# Altium PCB pcb.PcbDoc
Units mil, origin at the board's own origin, x right, y up, seen from the top; angles counter-clockwise.
Board outline 2325 x 3920 mil, 2 copper layers (Top Layer, Bottom Layer); 20 components, 17 nets, 68 pads, 146 vias.
Unrouted connection lines stored in the file: 4.
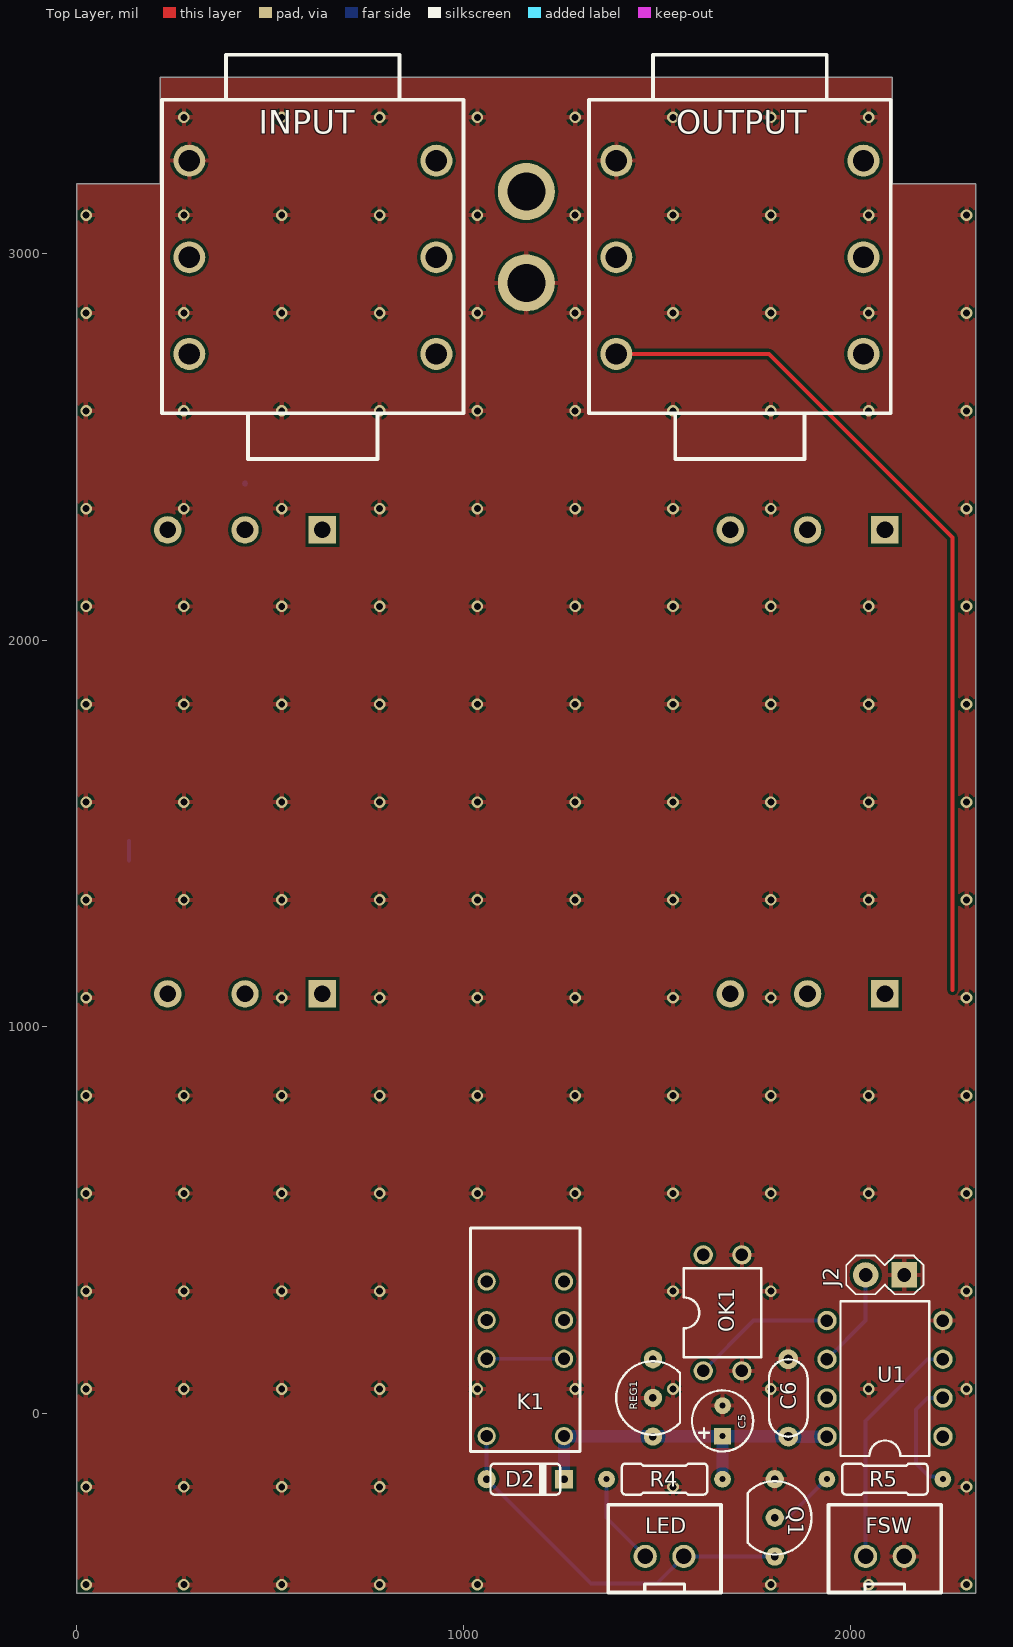
[diagram p0: Top Layer view]
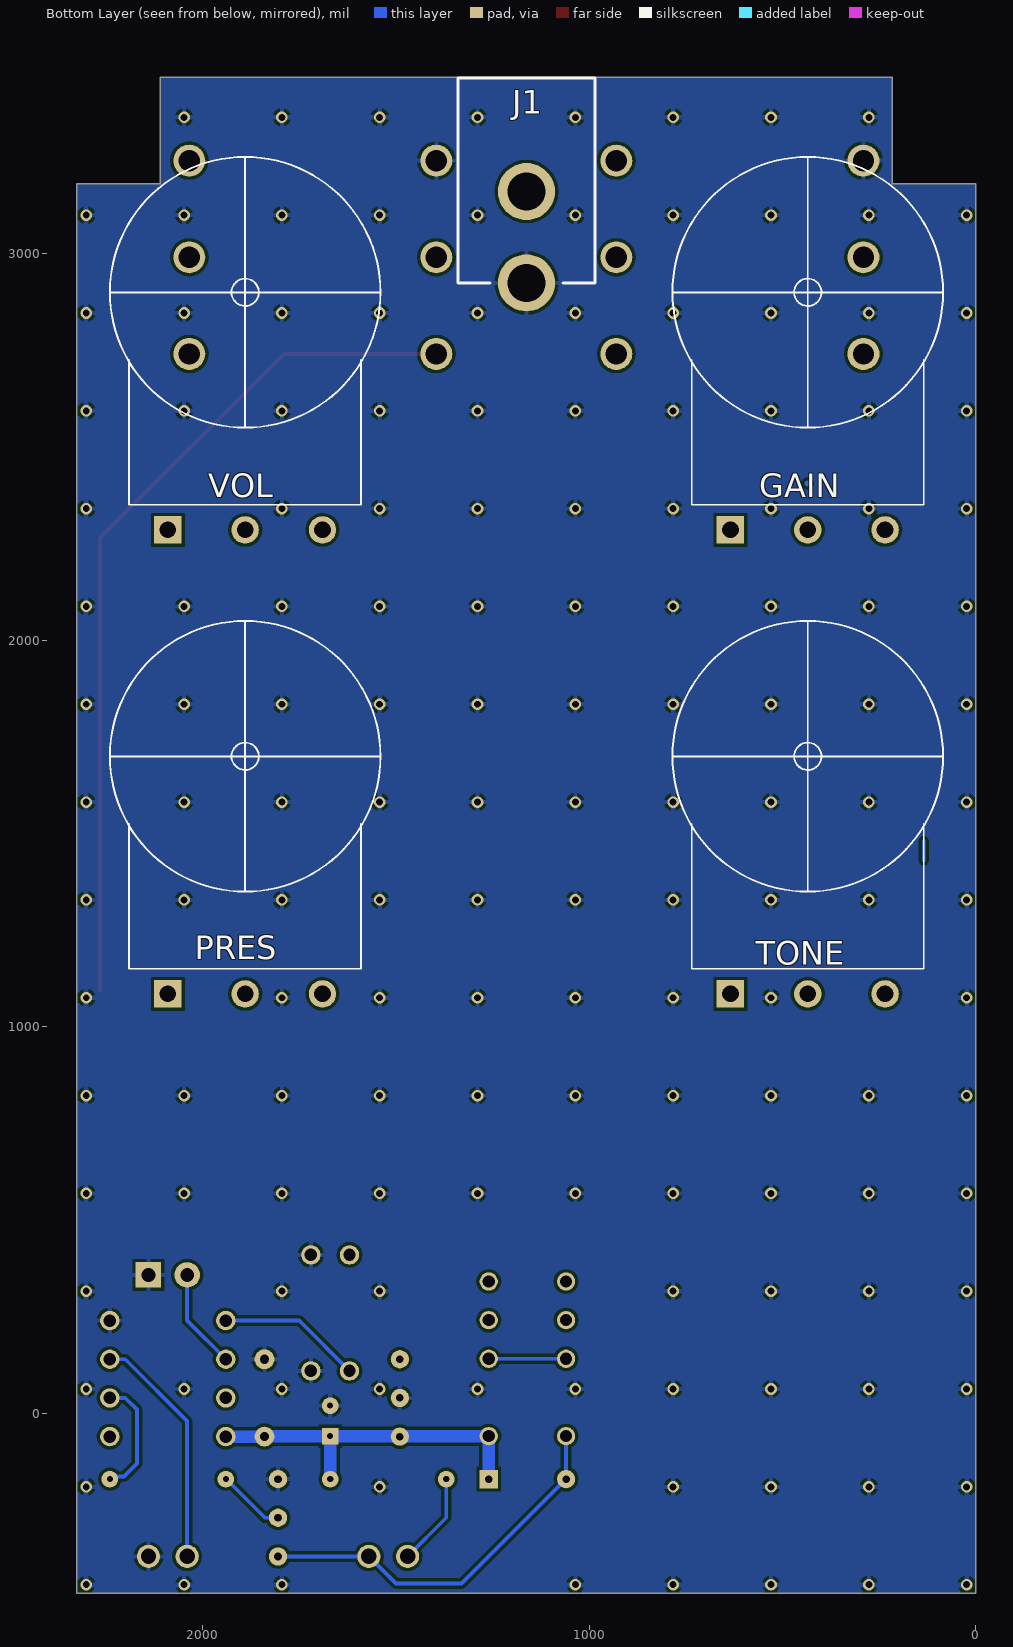
[diagram p1: Bottom Layer view, seen from below]
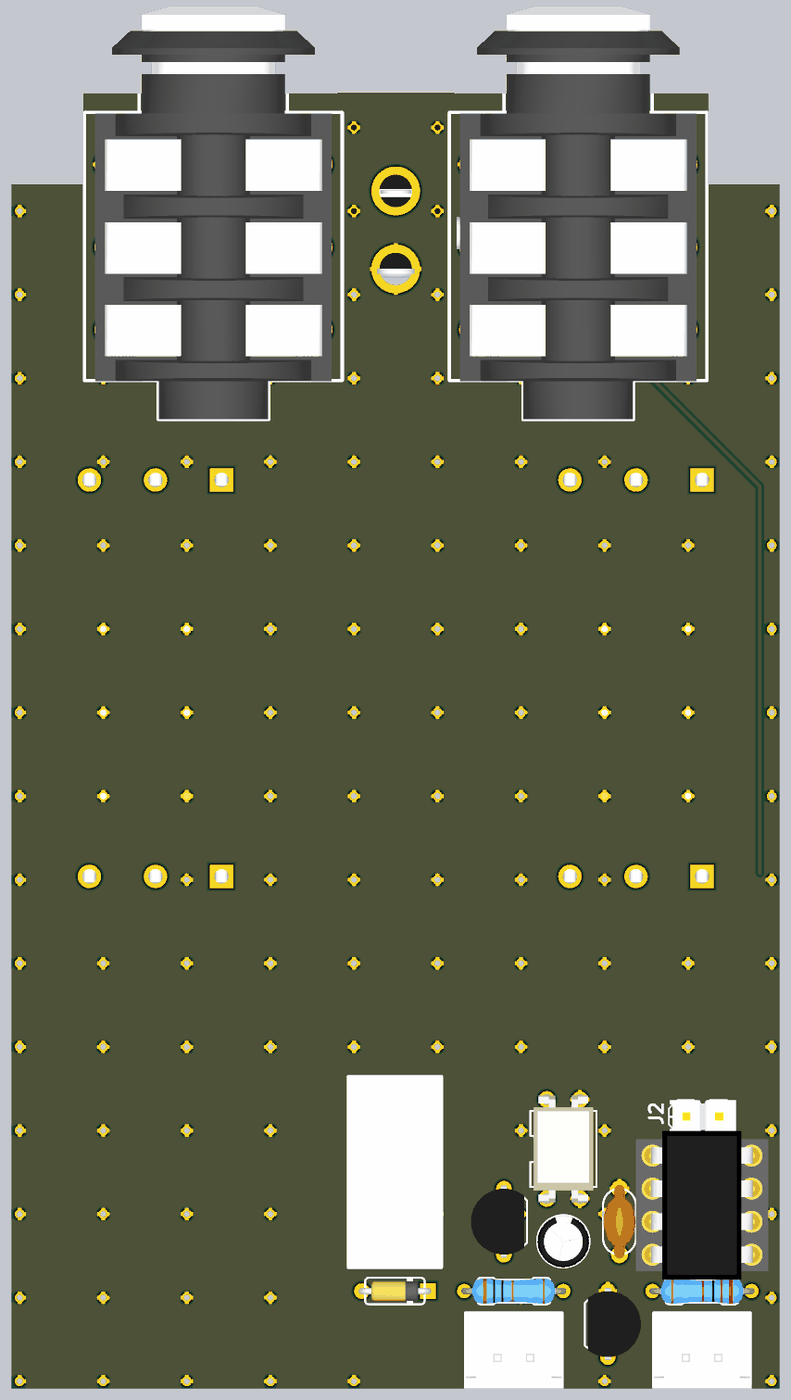
[diagram p2: 3D render of the assembled board from above, using the file's embedded part models]
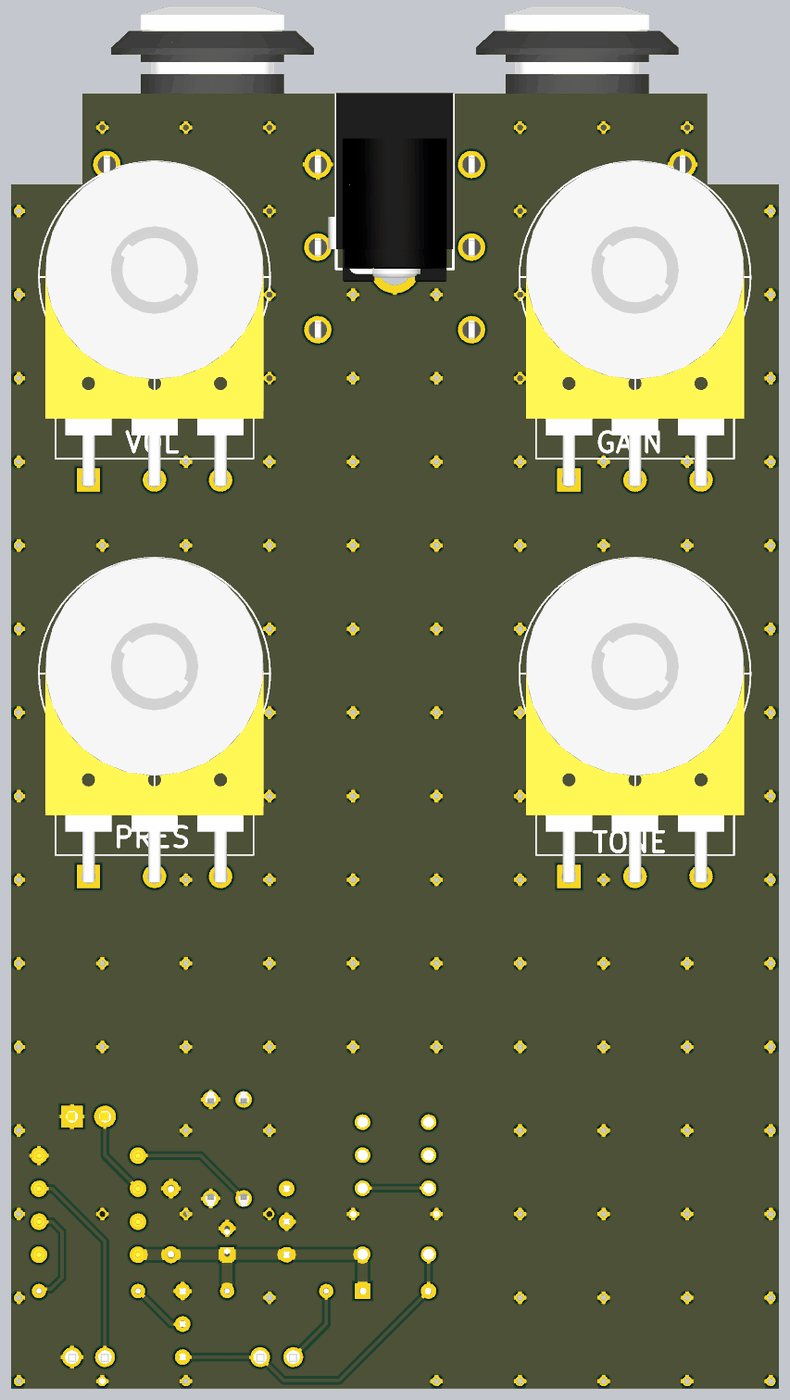
[diagram p3: 3D render of the assembled board from below, using the file's embedded part models]

## Layer stack, top to bottom
Top Solder: solder mask 0.4, Solder Resist, Dk 3.5
Top Layer: signal copper 1.4
Dielectric 1: dielectric 12.6, FR-4, Dk 4.8
Bottom Layer: signal copper 1.4
Bottom Solder: solder mask 0.4, Solder Resist, Dk 3.5

## Board outline
2109,3455 2109,3180 2325,3180 2325,-465 0,-465 0,3180 216,3180 216,3455

## Design rules (kind name [scope] priority, off if disabled: settings)
Clearance [All] p1: gap=8 ignorepadtopadclearanceinfootprint=FALSE except(0: Arc-Text Arc-Hole Track-Text Track-Hole SMDPad-Text SMDPad-Hole THPad-Text THPad-Hole Via-Text Via-Hole Fill-Text Fill-Hole Poly-Text Poly-Hole Region-Text Region-Hole Text-Text Text-Hole; 10: Arc-SMDPad Track-SMDPad SMDPad-SMDPad SMDPad-THPad SMDPad-Via THPad-THPad; 18: Arc-Arc Arc-Track Arc-THPad Track-Track Track-THPad)
ComponentClearance [All] p1 off: gap=10 collisioncheckmode=3 verticalgap=100000 showdistances=FALSE
Height [All] p1: minheight=0 maxheight=99999 prefheight=50000
PolygonConnect [All] p1: connectstyle=Relief reliefconductorwidth=12 reliefentries=4 polygonreliefangle="90 Angle" airgapwidth=8
RoutingVias [All] p1: holewidth=30 width=30 viastyle="Through Hole" minholewidth=10 minwidth=15 maxholewidth=20 maxwidth=40
SilkToSilkClearance [All] p1: silktosilkclearance=8
SolderMaskExpansion [All] p1: expansion=4
UnRoutedNet [All] p1: checkbadconnections=TRUE
Width [All] p1: maxlimit=32 minlimit=10 preferedwidth=10 minimp=50.000000 maximp=50.000000 favimp=50.000000
26 further rules are at their usual default settings.

## Classes and differential pairs
component class Template: C5 C6 D2 FSW GAIN INPUT J1 J2 K1 LED OK1 OUTPUT Q1 R4 R5 REG1 TONE U1

## Components (designator, comment, footprint, x,y, rotation, side; value= is the part's Value field where it differs from the comment)
C5 "10u" ELEC_040_020 1670.08,-20 r90 top
C6 "100n" CER_050 1840,40 r270 top
D2 "1N4148" DO35_2 1160,-170 r180 top
FSW "" JST-XH-02 2090,-370 r0 top
GAIN "250kB" ALPHA_16mm_BOTTOM 435,2284.37 r180 bottom
INPUT "" STEREO 610.51,2990 r90 top
J1 "DC_JACK" DC_JACK 1162.5,3343.15 r0 bottom
J2 "HEADER_2PINS" HEADER_2PINS 2090,358.16 r0 top
K1 "" NA5 1160,191.2 r90 top
LED "" JST-XH-02 1520,-370 r0 top
OK1 "TLP222G" DIL4 1670.08,260 r0 top
OUTPUT "" STEREO 1715,2990 r90 top
PRES "50kB" ALPHA_16mm_BOTTOM 1890,1084.37 r180 bottom
Q1 "2N3904" TO92 1805,-270 r270 top
R4 "1k" R_3_1k_025W 1519.94,-170 r0 top
R5 "22k" R_3_22k_025W 2090,-170 r180 top
REG1 "LM78L05" TO92 1490,40 r90 top
TONE "25kB" ALPHA_16mm_BOTTOM 435,1084.37 r180 bottom
U1 "ATTINY85" DIP8 2090,90 r90 top
VOL "100kA" ALPHA_16mm_BOTTOM 1890,2284.37 r180 bottom

## Footprints (in the part's own frame and the unit in brackets; to place one, negate y for a bottom-side part, rotate by r counter-clockwise, add the part's x,y. Pads: shape width x height; smd on the part's side, far side on the other; paste and mask are expansions set on the pad)
ALPHA_16mm_BOTTOM [mil]
  rect 70.87x70.87 hole 43.31: 1(-200,0.63)
  round 70.87 hole 43.31: 2(0,0.63) 3(200,0.63)
  silkscreen extent -350,66 350,965, body extent -330,-16 445,966, height 960
CER_050 [mil]
  round 51.18 hole 23.62: 1(-100,0) 2(100,0)
  silkscreen extent -100,-50 100,50, body extent -117,-49 110,66, height 196
DC_JACK [mil]
  round 147.65 hole 98.43: GND(0,183.15) PWR(0,419.37)
  silkscreen extent -177,-110 177,419, body extent -350,-113 201,457, height 437
DIL4 [mil]
  round 50 hole 32: 1(-50,-150) 2(50,-150) 3(50,150) 4(-50,150)
  silkscreen extent -100,-115 100,115, body extent -90,-173 90,173, height 174
DIP8 [mil]
  round 50 hole 32: 1(-150,-150) 2(-50,-150) 3(50,-150) 4(150,-150) 5(150,150) 6(50,150) 7(-50,150) 8(-150,150)
  silkscreen extent -200,-115 200,115, body extent -225,-200 225,200, height 335
DO35_2 [mil]
  round 47.24 hole 19.69: A(100,0)
  rect 47.24x47.24 hole 19.69: C(-100,0)
  silkscreen extent -90,-40 90,40, body extent -108,-30 108,30, height 60
ELEC_040_020 [mil]
  rect 43.31x43.31 hole 15.75: +(-38.8,0)
  round 43.31 hole 15.75: -(40,0)
  silkscreen extent -78,-79 80,79, body extent -79,-79 79,79, height 277
HEADER_2PINS [mil]
  rect 66x66 hole 35.43: 1(50,0)
  round 66 hole 35.43: 2(-50,0)
  silkscreen extent -100,-50 100,50, body extent -102,-50 102,50, height 330
JST-XH-02 [mil]
  round 60 hole 40: 1(-50,0) 2(50,0)
  silkscreen extent -146,-93 146,134, body extent -146,-95 146,131, height 276
NA5 [mil]
  round 47.25 hole 31.5: 1(-250,-100) 3(-50,-100) 4(50,-100) 5(150,-100) 8(150,100) 9(50,100) 10(-50,100) 12(-250,100)
  silkscreen extent -290,-142 289,142, body extent -291,-144 291,144, height 362
R_3_1k_025W [mil]
  round 43.31 hole 15.75: 1(-150,0) 2(150,0)
  silkscreen extent -111,-40 111,40, body extent -160,-38 160,38, height 83
R_3_22k_025W [mil]
  round 43.31 hole 15.75: 1(-150,0) 2(150,0)
  silkscreen extent -111,-40 111,40, body extent -160,-38 160,38, height 83
STEREO [mil]
  round 82.68 hole 55.12: R(0,319.49) RN(0,-319.49) S(250,319.49) SN(250,-319.49) T(-250,319.49) TN(-250,-319.49)
  silkscreen extent -522,-390 524,390, body extent -521,-358 730,358, height 632
TO92 [mil]
  round 47.24 hole 19.69: 1(100,0) 2(0,0) 3(-100,0)
  silkscreen extent -95,-70 95,95, body extent -109,-61 109,100, height 255

## Part data
C5: library part ELEC_10u_50V
C6: library part CER_100n
FSW LED: library part JST-XH-02
GAIN PRES TONE VOL: library part ALPHA_16mm
INPUT OUTPUT: library part STEREO
K1: library part NA5W-K, OC_FARNELL=unknown, OC_NEWARK=unknown
R4: library part R_3_1k_025W
R5: library part R_3_22k_025W
OK1: OC_FARNELL=unknown, OC_NEWARK=unknown

## Via types
v1: diameter 30, hole 18, Top Layer to Bottom Layer, 146 vias

## Nets (pads, with @x,y where several pads share a name; then routed paths per layer and width w, separated by ;. In a path a pad name is that pad's centre, name@x,y a point inside that pad or via, vN(x,y) a via of type N, cw(c..) or ccw(c..) an arc to the next point about the centre after c; other vN are vias at no path point)
+5V: C5.+ C6.2 D2.C K1.1 R4.2 REG1.3 U1.8 | length 903.8
  Bottom Layer w32: D2.C K1.1 1260.6,-59.4 1489.4,-59.4 REG1.3 1490.6,-59.4 1669.48,-59.4 C5.+@1670.01,-58.87 ; R4.2 1670.01,-169.93 C5.+@1670.01,-58.87 ; U1.8 C6.2 1839.4,-59.4 1670.68,-59.4 C5.+ C5.+@1670.01,-58.87
+9V: J1.GND REG1.1
GND: C5.- C6.1 FSW.2 INPUT.S J1.PWR J2.1 OK1.2 OK1.3 OUTPUT.S Q1.3 REG1.2 U1.4
  other v1: 24,-443 277,-443 530,-443 783,-443 1036,-443 1795,-443 2048,-443 2301,-443 24,-190 277,-190 530,-190 783,-190 1542,-190 2301,-190 24,63 277,63 530,63 783,63 1036,63 1289,63 1542,63 1795,63 2048,63 2301,63 24,316 277,316 530,316 783,316 1542,316 1795,316 2301,316 24,569 277,569 530,569 783,569 1036,569 1289,569 1542,569 1795,569 2048,569 2301,569 24,822 277,822 530,822 783,822 1036,822 1289,822 1542,822 1795,822 2048,822 2301,822 24,1075 530,1075 783,1075 1036,1075 1289,1075 1542,1075 1795,1075 2301,1075 24,1328 277,1328 530,1328 783,1328 1036,1328 1289,1328 1542,1328 1795,1328 2048,1328 2301,1328 24,1581 277,1581 530,1581 783,1581 1036,1581 1289,1581 1542,1581 1795,1581 2048,1581 2301,1581 24,1834 277,1834 530,1834 783,1834 1036,1834 1289,1834 1542,1834 1795,1834 2048,1834 2301,1834 24,2087 277,2087 530,2087 783,2087 1036,2087 1289,2087 1542,2087 1795,2087 2048,2087 2301,2087 24,2340 277,2340 530,2340 783,2340 1036,2340 1289,2340 1542,2340 1795,2340 2301,2340 24,2593 277,2593 530,2593 783,2593 1036,2593 1289,2593 1542,2593 1795,2593 2048,2593 2301,2593 24,2846 277,2846 530,2846 783,2846 1036,2846 1289,2846 1542,2846 1795,2846 2048,2846 2301,2846 24,3099 277,3099 530,3099 783,3099 1036,3099 1289,3099 1542,3099 1795,3099 2048,3099 2301,3099 277,3352 530,3352 783,3352 1036,3352 1289,3352 1542,3352 1795,3352 2048,3352
INPUT: INPUT.T K1.9
NetD2_A: D2.A K1.12 LED.2 Q1.1 | length 997
  Bottom Layer w10: K1.12 D2.A 1330,-440 1500,-440 LED.2 Q1.1
NetK1_3: K1.3 K1.10 | length 200
  Bottom Layer w10: K1.10 K1.3
NetLED_1: LED.1 R4.1 | length 241.4
  Bottom Layer w10: R4.1 1369.94,-269.94 LED.1
NetQ1_2: Q1.2 R5.2 | length 176.4
  Bottom Layer w10: Q1.2 1838.91,-270 1938.91,-170 R5.2
OUTPUT: K1.4 OK1.4 OUTPUT.T | length 2242.5
  Top Layer w10: OUTPUT.T 1790,2740 2265,2265 2265,1095
  Bottom Layer w10: OK1.4@1620.08,403.79 OK1.4
PB0: OK1.1 U1.5 | length 373.8
  Bottom Layer w10: OK1.1 1750.08,240 U1.5
PB1: J2.2 U1.6 | length 259.6
  Bottom Layer w10: U1.6 2040,240 J2.2
PB2: U1.7
PB3: R5.1 U1.2 | length 309
  Bottom Layer w10: R5.1 2233.63,-163.63 2203.63,-163.63 2170,-130 2170,10 2200,40 U1.2
PB4: FSW.1 U1.3 | length 616.3
  Bottom Layer w10: FSW.1 2040,-20 2200,140 U1.3
PB5: U1.1
RETURN: K1.5
SEND: K1.8
pads on no net: GAIN.1 GAIN.2 GAIN.3 INPUT.R INPUT.RN INPUT.SN INPUT.TN OUTPUT.R OUTPUT.RN OUTPUT.SN OUTPUT.TN PRES.1 PRES.2 PRES.3 TONE.1 TONE.2 TONE.3 VOL.1 VOL.2 VOL.3
copper on no net: | length 71.6
  Bottom Layer w10: 135,1430 135,1480 ; 235,2285 235,2305.91
  Bottom Layer w15: 435,2285 435.26,2285.26 ; 435.26,2404.74 435.51,2405

## Polygon pours and split planes (outlines as drawn)
GND on Top Layer "GND_L01_P010" (solid, pour order 10): 0,-465 2325,-465 2325,3180 2110,3180 2110,3455 215,3455 215,3180 0,3180
GND on Bottom Layer "GND_L02_P008" (solid, pour order 8): 0,-465 2325,-465 2325,3175 2330,3180 2110,3180 2110,3455 215,3455 215,3180 0,3180